# EAGLE board PCB-DISPARRAY4b (EAGLE 7.1.0)
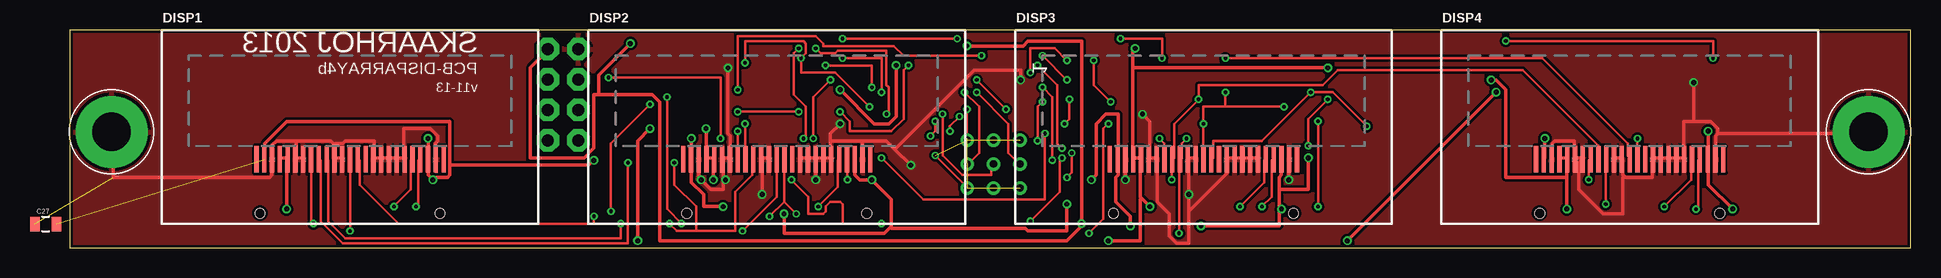
[diagram p0: board, top side]
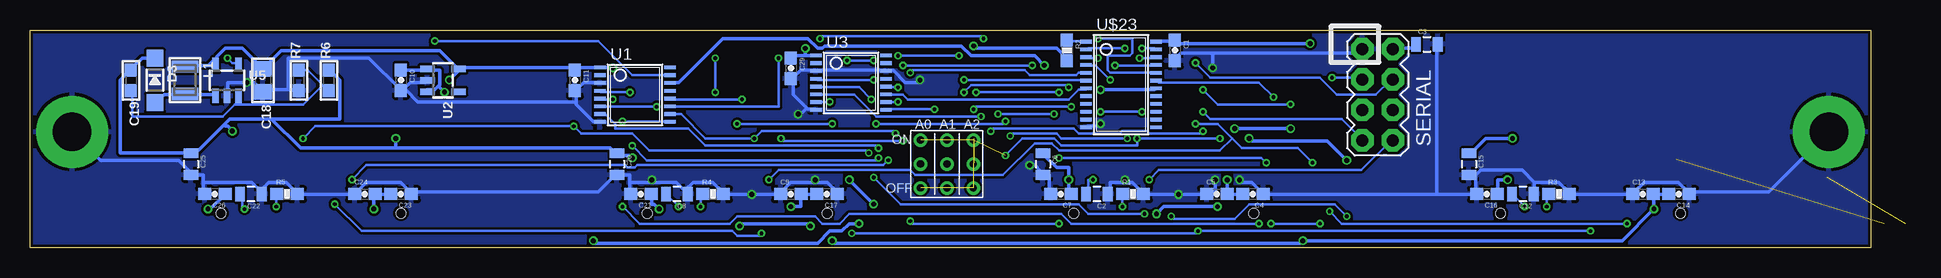
[diagram p1: board, bottom side, seen from below]

Size 153.42 x 18.2 mm. Coordinates in mm from the lower left corner, seen from the top.
Outline: 153.42,0 153.42,18.2 0,18.2 0,0 153.42,0
Copper layers (1*16): Top 0.035mm / dielectric 1.5mm / Bottom 0.035mm
Design rules "Fusion_eagle_rule_v1.1": minimum track width 6mil, minimum drill 12mil, track to track 6mil, track to pad 6mil, pad to pad 6mil, via to via 6mil, smd to smd 0mil, copper to edge 10mil, drill to drill 10mil, minimum pad ring 10mil, minimum via ring 6mil, stop-mask expansion 2mil, vias tented up to drill 100mil, thermal gap 10mil
Net classes: 0 default: width 0.203 mm, drill 0.305 mm, clearance 0.203 mm; 1 Power: width 0.305 mm, drill 0.406 mm, clearance 0.203 mm

## Footprints (pad centres in the part's own frame; a part is rotated, then mirrored left to right if it is on the bottom)
0603-CAP = smd 1.1 x 1: 1 -0.85,0; 2 0.85,0
0805 = smd 0.8 x 1.2: 1 -0.9,0; 2 0.9,0
0805' = smd 1.3 x 1.5: 1 -0.95,0; 2 0.95,0
0603 = smd 1.1 x 1: 1 -0.85,0; 2 0.85,0
SOD-123 = smd 1.4 x 1.4: A 1.85,0; C -1.85,0
ER-OLED011-1 = smd 0.35 x 2.2: 1 -7.8,-2.7; 2 -7.15,-2.7; 3 -6.5,-2.7; 4 -5.85,-2.7; 5 -5.2,-2.7; 6 -4.55,-2.7; 7 -3.9,-2.7; 8 -3.25,-2.7; 9 -2.6,-2.7; 10 -1.95,-2.7; 11 -1.3,-2.7; 12 -0.65,-2.7; 13 0,-2.7; 14 0.65,-2.7; 15 1.3,-2.7; 16 1.95,-2.7; 17 2.6,-2.7; 18 3.25,-2.7; 19 3.9,-2.7; 20 4.55,-2.7; 21 5.2,-2.7; 22 5.85,-2.7; 23 6.5,-2.7; 24 7.15,-2.7; 25 7.8,-2.7 | hole 0.8: -7.5,-7.2; 7.5,-7.2
INDUCTOR_1007 = smd 1.016 x 2.2: P$1 -1.127,0; P$2 1.127,0
0603-RES = smd 1.1 x 1: 1 -0.85,0; 2 0.85,0
2X4 = drill 1.016 pad 1.88 octagon: 1 -3.81,-1.27; 2 -3.81,1.27; 3 -1.27,-1.27; 4 -1.27,1.27; 5 1.27,-1.27; 6 1.27,1.27; 7 3.81,-1.27; 8 3.81,1.27
TSSOP16 = smd 0.305 x 0.991: 1 -3.575,-2.918; 2 -2.925,-2.918; 3 -2.275,-2.918; 4 -1.625,-2.918; 5 -0.975,-2.918; 6 -0.325,-2.918; 7 0.325,-2.918; 8 0.975,-2.918; 9 0.975,2.918; 10 0.325,2.918; 11 -0.325,2.918; 12 -0.975,2.918; 13 -1.625,2.918; 14 -2.275,2.918; 15 -2.925,2.918; 16 -3.575,2.918
SOT23-5 = smd 0.55 x 1.2: 1 -0.95,-1.3; 2 0,-1.3; 3 0.95,-1.3; 4 0.95,1.3; 5 -0.95,1.3
3.2MMPAD6MM = drill 3.2 pad 6: P$1 0,0
3BITADDR = drill 0.6: A0 -2.2,0; A1 0,0; A2 2.2,0; H1 -2.2,2; H2 0,2; H3 2.2,2; L1 -2.2,-2; L2 0,-2; L3 2.2,-2
TSSOP24 = smd 0.305 x 0.991: 1 -4.225,-2.918; 2 -3.575,-2.918; 3 -2.925,-2.918; 4 -2.275,-2.918; 5 -1.625,-2.918; 6 -0.975,-2.918; 7 -0.325,-2.918; 8 0.325,-2.918; 9 0.975,-2.918; 10 1.625,-2.918; 11 2.275,-2.918; 12 2.925,-2.918; 13 2.925,2.918; 14 2.275,2.918; 15 1.625,2.918; 16 0.975,2.918; 17 0.325,2.918; 18 -0.325,2.918; 19 -0.975,2.918; 20 -1.625,2.918; 21 -2.275,2.918; 22 -2.925,2.918; 23 -3.575,2.918; 24 -4.225,2.918

## Placement (x,y rotation side)
C1  0.1uF  [0603-CAP]  58,16.5 270 bottom
C2  4.7uF/25V  [0805]  64.5,4.5 180 bottom
C3  10uF  [0805]  37,17 0 bottom
C4  100nF  [0603-CAP]  51.5,4.5 180 bottom
C5  4.7uF  [0603-CAP]  54.5,4.5 0 bottom
C6  10uF  [0805]  69,7 270 bottom
C7  100nF  [0603-CAP]  67.5,4.5 180 bottom
C8  4.7uF/25V  [0805]  99.5,4.5 180 bottom
C9  100nF  [0603-CAP]  90,4.5 0 bottom
C10  2.2uF  [0603-CAP]  122.5,14 270 bottom
C11  0.1uF  [0603-CAP]  108,14 270 bottom
C12  4.7uF/25V  [0805]  29,4.5 180 bottom
C13  100nF  [0603-CAP]  19,4.5 0 bottom
C14  4.7uF  [0603-CAP]  16,4.5 180 bottom
C15  10uF  [0805]  33.5,7 270 bottom
C16  100nF  [0603-CAP]  32,4.5 180 bottom
C17  4.7uF  [0603-CAP]  87,4.5 180 bottom
C18  10uF  [0805']  134,14 270 bottom
C19  0.1uF  [0603]  145,14 270 bottom
C20  10uF  [0805]  104.5,7 270 bottom
C21  100nF  [0603-CAP]  102.5,4.5 180 bottom
C22  4.7uF/25V  [0805]  135,4.5 180 bottom
C23  100nF  [0603-CAP]  122.5,4.5 180 bottom
C24  4.7uF  [0603-CAP]  125.5,4.5 0 bottom
C25  10uF  [0805]  140,7 270 bottom
C26  100nF  [0603-CAP]  138,4.5 180 bottom
C27  10uF/25V  [0805]  -2,2 0 top
C29  0.1uF  [0603-CAP]  90,15 270 bottom
D3  BAT54T1G  [SOD-123]  143,14 270 bottom
DISP1  [ER-OLED011-1]  23.37,10.1 0 top
DISP2  [ER-OLED011-1]  58.93,10.1 0 top
DISP3  [ER-OLED011-1]  94.49,10.1 0 top
DISP4  [ER-OLED011-1]  130,10.1 0 top
L1  10uH  [INDUCTOR_1007]  140.5,14 270 bottom
R1  390K  [0603-RES]  61.5,4.5 0 bottom
R2  10K  [0603-RES]  67,16.5 270 bottom
R3  390K  [0603-RES]  26,4.5 0 bottom
R4  390K  [0603-RES]  96.5,4.5 0 bottom
R5  390K  [0603-RES]  132,4.5 0 bottom
R6  51K  [0603]  128.5,14 90 bottom
R7  10K  [0603]  131,14 90 bottom
SERIAL  M04X2  [2X4]  41.12,12.79 270 bottom
U1  74HC4050D  [TSSOP16]  103,11.5 270 bottom
U2  [SOT23-5]  119,14 270 bottom
U3  74HC4050D  [TSSOP16]  85,12.5 270 bottom
U5  FAN5331SX  [SOT23-5]  137,14 0 bottom
U$11  GNDPAD6MM  [3.2MMPAD6MM]  149.92,9.7 0 top
U$18  GNDPAD6MM  [3.2MMPAD6MM]  3.5,9.7 0 top
U$19  3BITADDR  [3BITADDR]  77,7 0 bottom
U$23  PCA9671  [TSSOP24]  62.5,13 270 bottom

## Library data of the parts
C1-C17 C20-C27 C29 R1-R5 SERIAL = SparkFun
C18 C19 D3 L1 R6 R7 U2 U5 = microbuilder
DISP1-DISP4 U1 U3 U$11 U$18 U$19 U$23 = SKAARHOJ

## Nets
3.3V [Power]: C4.2 C5.2 C9.2 C11.1 C13.2 C14.2 C17.2 C18.1 C23.2 C24.2 C29.1 DISP1.4 DISP1.5 DISP2.4 DISP2.5 DISP3.4 DISP3.5 DISP4.4 DISP4.5 L1.P$1 U1.1 U2.5 U3.1 U5.5
5V [Power]: C1.1 C3.1 C10.1 R2.2 SERIAL.2 U2.1 U2.3 U$23.24
7.5V [Power]: C6.1 C7.1 C15.1 C16.1 C19.1 C20.1 C21.1 C25.1 C26.1 C27.2 D3.C DISP1.2 DISP1.23 DISP2.2 DISP2.23 DISP3.2 DISP3.23 DISP4.2 DISP4.23 R6.2
A0: U$19.A0 U$23.21
A1: U$19.A1 U$23.2
A2: U$19.A2 U$23.3
CS_DISP1: DISP1.8 U3.4
CS_DISP2: DISP2.8 U3.6
CS_DISP3: DISP3.8 U3.10
CS_DISP4: DISP4.8 U3.12
DC_3V3: DISP1.10 DISP2.10 DISP3.10 DISP4.10 U1.10
DC_5V: U1.9 U$23.19
DPWR_3V3: U1.15 U5.4
DPWR_5V [Power]: U1.14 U$23.18
GND [Power]: C1.2 C2.1 C3.2 C4.1 C5.1 C6.2 C7.2 C8.1 C9.1 C10.2 C11.2 C12.1 C13.1 C14.1 C15.2 C16.2 C17.1 C18.2 C20.2 C21.2 C22.1 C23.1 C24.1 C25.2 C26.2 C27.1 C29.2 DISP1.3 DISP1.6 DISP1.7 DISP1.11 DISP1.12 DISP1.16 DISP1.17 DISP1.18 DISP1.19 DISP1.20 DISP1.24 DISP2.3 DISP2.6 DISP2.7 DISP2.11 DISP2.12 DISP2.16 DISP2.17 DISP2.18 DISP2.19 DISP2.20 DISP2.24 DISP3.3 DISP3.6 DISP3.7 DISP3.11 DISP3.12 DISP3.16 DISP3.17 DISP3.18 DISP3.19 DISP3.20 DISP3.24 DISP4.3 DISP4.6 DISP4.7 DISP4.11 DISP4.12 DISP4.16 DISP4.17 DISP4.18 DISP4.19 DISP4.20 DISP4.24 R1.2 R3.2 R4.2 R5.2 R7.1 SERIAL.1 U1.3 U1.8 U2.2 U3.3 U3.8 U3.14 U5.2 U$11.P$1 U$18.P$1 U$23.12
I2C_SCL: SERIAL.4 U$19.L1 U$19.L2 U$19.L3 U$23.22
I2C_SDA: SERIAL.3 U$19.H1 U$19.H2 U$19.H3 U$23.23
N$1: R2.1 U$23.1
N$2: DISP2.21 R1.1
N$3: C2.2 DISP2.22
N$4: DISP3.21 R4.1
N$5: DISP1.21 R3.1
N$6: C8.2 DISP3.22
N$7: DISP4.21 R5.1
N$8: C22.2 DISP4.22
N$10: C12.2 DISP1.22
N$14 [Power]: D3.A L1.P$2 U5.1
N$15: C19.2 R6.1 R7.2 U5.3
N$29: U3.5 U$23.4
N$30: U3.7 U$23.5
N$31: U3.9 U$23.6
N$32: U3.11 U$23.7
RES_3V3: DISP1.9 DISP2.9 DISP3.9 DISP4.9 U1.12
RES_5V: U1.11 U$23.20
SCLK_3V3: DISP1.13 DISP2.13 DISP3.13 DISP4.13 U1.6
SDIN_3V3: DISP1.14 DISP2.14 DISP3.14 DISP4.14 U1.4
SPI_MOSI: SERIAL.8 U1.5
SPI_SCLK: SERIAL.7 U1.7

## Tracks (layer width: path | path; a pad name or v marks a point on that pad's centre or on a via)
3.3V  (via drill 0.41)
  Top 0.305: v53.65,5.69 53.65,7.32 DISP2.5 53.65,7.52 53.24,7.52 DISP2.4 53.03,7.52 v53.03,9.96 | v18.09,3.25 18.09,7.32 DISP1.5 18.09,7.52 17.68,7.52 DISP1.4 | v48.36,9.96 47.35,8.94 v47.35,0.61 | 89.31,4.17 89.2,4.27 89.2,7.32 DISP3.5 89.2,7.52 88.8,7.52 DISP3.4 88.59,7.52 88.59,15.04 | 89.31,4.17 v90.02,3.45 | v88.8,16.66 88.59,16.46 88.59,15.04 | 124.77,5.89 124.77,7.32 DISP4.5 124.77,7.52 124.16,7.52 DISP4.4 | 124.77,5.89 v124.77,3.25 | 124.77,5.89 119.69,5.89 119.69,13.21 118.87,14.02 v118.47,14.02 | v104.85,15.04 88.59,15.04 | v86.56,0.61 89.2,0.61 89.2,4.06 89.31,4.17
  Bottom 0.305: C4.2 52.43,4.47 53.65,4.47 C5.2 53.65,4.67 v53.65,5.69 | 18.09,4.47 16.87,4.47 C14.2 | 18.09,4.47 v18.09,3.25 20.73,0.61 v47.35,0.61 47.55,0.41 86.36,0.41 v86.56,0.61 | 18.09,4.47 C13.2 | v48.36,9.96 v53.03,9.96 | C17.2 87.99,4.47 89,4.47 C9.2 89.2,4.47 89.2,3.45 v90.02,3.45 | 88.8,16.05 89.81,16.05 C29.1 | 88.8,16.05 87.99,16.05 U3.1 | v88.8,16.66 88.8,16.05 | 138.58,15.24 140.41,15.24 L1.P$1 | 138.58,15.24 137.97,15.24 U5.5 | 138.58,15.24 137.16,16.66 135.74,16.66 134.11,15.04 C18.1 133.91,15.04 132.49,16.46 119.28,16.46 117.86,15.04 U2.5 | C23.2 123.55,4.47 124.56,4.47 C24.2 124.77,4.47 v124.77,3.25 | U2.5 117.65,15.04 108.1,15.04 C11.1 107.9,15.04 106.07,15.04 U1.1 105.87,15.04 v104.85,15.04 | v118.47,14.02 117.65,14.83 U2.5
5V  (via drill 0.41)
  Top 0.305: v74.78,16.87 79.45,16.87 79.86,17.27 84.33,17.27 v84.33,2.03 84.33,1.83 83.11,0.61 49.17,0.61 49.17,12.19 48.56,12.8 44.09,12.8 | 44.09,12.8 43.69,12.8 43.69,8.33 42.88,7.52 38.41,7.52 38.41,15.04 39.83,16.46 SERIAL.2 | v46.74,17.07 44.09,14.43 44.09,12.8 | v106.48,0.61 v118.87,13.01
  Bottom 0.305: C10.1 122.33,14.83 120.5,14.83 U2.1 120.29,14.83 119.28,14.83 119.28,13.61 119.38,13.51 | 119.38,13.51 119.69,13.21 120.29,13.21 U2.3 | U$23.24 59.54,17.27 58.12,17.27 C1.1 57.91,17.27 57.71,17.07 v46.74,17.07 | v74.78,16.87 74.57,16.66 67.87,16.66 67.06,15.85 R2.2 | C3.1 38,16.87 38.2,16.66 39.83,16.66 SERIAL.2 | v118.87,13.01 119.38,13.51 | v106.48,0.61 106.27,0.41 87.78,0.41 86.77,1.42 85.75,1.42 85.14,2.03 v84.33,2.03
7.5V  (via drill 0.41)  (1 unrouted)
  Top 0.305: 65.43,7.52 DISP2.23 65.43,7.32 65.43,6.1 65.84,5.69 v66.85,5.69 68.48,4.06 68.48,1.83 68.38,1.73 | v29.87,9.14 29.87,7.52 DISP1.23 29.87,7.32 29.87,6.1 v30.28,5.69 30.28,5.89 31.5,5.89 31.7,6.1 31.7,6.91 | 31.7,6.91 31.7,10.57 18.09,10.57 16.26,8.74 16.26,7.52 DISP1.2 | v51.82,9.14 51.82,7.52 DISP2.2 51.82,7.32 51.82,5.49 52.83,4.47 52.83,3.45 v54.46,3.45 | v43.69,7.32 43.28,6.91 31.7,6.91 | 68.38,1.73 67.87,1.22 59.54,1.22 v59.54,2.85 | 100.79,4.88 100.79,5.89 100.99,6.1 100.99,7.32 DISP3.23 100.99,7.52 | 100.79,4.88 100.79,3.45 v100.99,3.25 100.79,3.25 100.79,1.83 v94.28,1.83 | v88.39,1.83 88.39,2.64 87.17,3.86 87.17,5.89 87.38,6.1 87.38,7.32 DISP3.2 87.38,7.52 87.38,11.18 86.36,11.18 85.55,10.36 85.55,6.1 v85.14,5.69 | v138.58,3.25 136.55,5.28 136.55,7.32 DISP4.23 136.55,7.52 v136.55,9.75 | v122.94,9.14 122.94,7.52 DISP4.2 | 100.79,4.88 103.23,4.88 v103.23,7.52 | v83.11,3.66 83.11,1.42 79.86,1.42 79.65,1.63 68.48,1.63 68.38,1.73
  Bottom 0.305: C7.1 66.85,4.67 v66.85,5.69 66.85,6.71 67.87,6.71 68.89,7.72 C6.1 | v30.28,5.69 31.09,5.69 31.09,4.67 C16.1 | v29.87,9.14 32.11,9.14 33.33,7.92 C15.1 | v51.82,9.14 51.61,8.94 45.31,8.94 v43.69,7.32 | v59.54,2.85 58.93,3.45 v54.46,3.45 | v100.99,3.25 101.4,3.66 101.6,3.66 101.6,4.47 C21.1 | v88.39,1.83 88.59,2.03 94.08,2.03 v94.28,1.83 | v138.58,3.25 138.38,3.25 137.16,4.47 C26.1 | D3.C 143.05,15.85 144.07,15.85 144.88,15.04 C19.1 145.09,14.83 145.9,14.02 145.9,7.92 140,7.92 C25.1 139.8,7.92 139.6,7.92 137.26,10.26 | 133.3,10.77 136.75,10.77 137.26,10.26 | 133.3,10.77 127.61,10.77 127.61,14.02 128.42,14.83 R6.2 | 122.94,8.33 130.86,8.33 133.3,10.77 | 122.94,8.33 105.05,8.33 104.65,7.92 C20.1 104.44,7.72 103.43,7.72 v103.23,7.52 | 122.94,8.33 v122.94,9.14 | v136.55,9.75 136.96,10.16 137.16,10.16 137.26,10.26 | v85.14,5.69 v83.11,3.66
A0  (via drill 0.3)
  Top 0.203: v62.99,15.24 66.85,15.24 v66.85,13.41 | v75.59,13.01 78.23,10.36 78.23,7.92 79.05,7.11 U$19.A0
  Bottom 0.203: v62.99,15.24 59.74,15.24 U$23.21 | v66.85,13.41 67.06,13.61 74.98,13.61 v75.59,13.01
A1  (via drill 0.3)
  Top 0.203: v62.18,16.66 62.59,16.26 63.8,16.26 64.01,16.46 68.07,16.46 68.07,13.61 68.28,13.41 68.28,11.38 v68.07,11.18 | v72.75,11.18 72.75,7.72 74.37,6.1 76.81,6.1 76.81,6.91 U$19.A1
  Bottom 0.203: v62.18,16.66 65.23,16.66 U$23.2 | v72.75,11.18 v68.07,11.18
A2  (via drill 0.3)
  Top 0.203: v64.41,15.85 67.67,15.85 v67.67,13.01 | v74.57,13.01 75.79,11.79 75.79,7.92 74.98,7.11 U$19.A2
  Bottom 0.203: v64.41,15.85 65.23,15.85 U$23.3 | v74.57,13.01 v67.67,13.01
CS_DISP1  (via drill 0.3)
  Top 0.203: v81.08,16.05 v83.11,14.02 | v76,16.05 69.49,16.05 68.68,16.87 62.79,16.87 62.79,17.07 62.18,17.68 55.68,17.68 v55.68,13.21 | v48.36,11.99 45.11,8.74 v45.11,3.05 | v20.32,2.03 20.12,2.23 20.12,7.32 DISP1.8
  Bottom 0.203: v83.11,14.02 87.78,14.02 U3.4 | v76,16.05 v81.08,16.05 | v55.68,13.21 54.46,11.99 v48.36,11.99 | v45.11,3.05 44.09,2.03 v20.32,2.03
CS_DISP2  (via drill 0.3)
  Top 0.203: v74.17,10.97 73.36,10.16 v73.36,9.75 | v55.68,9.75 55.68,7.52 DISP2.8
  Bottom 0.203: v74.17,10.97 82.91,10.97 84.73,12.8 87.78,12.8 U3.6 | v73.36,9.75 73.15,9.96 66.45,9.96 66.04,9.55 62.59,9.55 62.38,9.75 60.35,9.75 60.15,9.55 55.88,9.55 v55.68,9.75
CS_DISP3  (via drill 0.3)
  Top 0.203: v81.08,12.19 80.67,11.79 v80.67,8.94 | v90.83,9.14 91.24,8.74 91.24,7.52 DISP3.8
  Bottom 0.203: v81.08,12.19 81.89,12.19 U3.10 | v80.67,8.94 90.63,8.94 v90.83,9.14
CS_DISP4  (via drill 0.3)
  Top 0.203: v81.08,13.41 81.89,12.6 v81.89,7.32 | v126.59,5.69 126.59,7.32 DISP4.8
  Bottom 0.203: v81.08,13.41 81.89,13.41 U3.12 | v81.89,7.32 82.3,6.91 102.82,6.91 103.02,6.71 103.63,6.71 103.83,6.91 125.37,6.91 v126.59,5.69
DC_3V3  (via drill 0.3)
  Top 0.203: v45.92,2.03 45.92,0.81 22.96,0.81 21.54,2.23 21.54,7.32 DISP1.10 | v49.99,2.03 50.6,1.42 52.22,1.42 | 52.22,1.42 55.47,1.42 55.47,4.67 56.9,6.1 56.9,7.32 DISP2.10 | v93.07,9.14 92.66,8.74 92.66,7.52 DISP3.10 92.46,7.32 v92.46,1.22 | v128.02,3.66 128.02,7.32 DISP4.10 | 52.22,1.42 52.22,3.45 50.39,5.28 v50.39,7.11 | v67.67,7.52 71.12,4.06 81.28,4.06 v81.28,9.55
  Bottom 0.203: v49.99,2.03 v45.92,2.03 | U1.10 99.97,11.18 99.16,11.18 97.13,9.14 v93.07,9.14 92.46,9.75 81.48,9.75 v81.28,9.55 | v128.02,3.66 125.78,1.42 94.89,1.42 94.49,1.02 92.66,1.02 v92.46,1.22 | v50.39,7.11 50.8,7.52 v67.67,7.52
DC_5V  (via drill 0.3)
  Top 0.203: v104.04,3.45 v104.04,10.57 | v51,2.03 49.78,3.25 v49.78,12.6
  Bottom 0.203: v104.04,10.57 100.18,10.57 U1.9 | v104.04,3.45 102.62,2.03 95.1,2.03 94.49,2.64 87.99,2.64 87.38,2.03 85.95,2.03 85.14,2.85 67.46,2.85 66.65,2.03 v51,2.03 | v49.78,12.6 51,13.82 59.33,13.82 59.54,14.02 U$23.19
DPWR_3V3  (via drill 0.3)
  Top 0.203: v119.69,17.27 136.96,17.27 v136.96,15.85
  Bottom 0.203: v119.69,17.27 106.07,17.27 103.23,14.43 100.18,14.43 U1.15 | v136.96,15.85 136.55,15.44 136.14,15.44 U5.4
DPWR_5V  (via drill 0.41)
  Top 0.305: v64.21,13.21 67.06,10.36 68.28,10.36 68.89,10.97 v68.89,15.24
  Bottom 0.305: v64.21,13.21 59.74,13.21 U$23.18 | v68.89,15.24 69.7,16.05 74.98,16.05 75.79,16.87 87.17,16.87 87.38,16.66 87.78,16.66 88.59,17.48 95.71,17.48 99.36,13.82 99.97,13.82 U1.14
GND  (via drill 0.41)  (1 unrouted)
  Top 0.305: 22.15,7.52 22.55,7.52 DISP1.12 | 18.9,8.94 17.27,8.94 16.87,8.53 16.87,7.52 DISP1.3 16.87,7.32 16.87,6.1 16.66,5.89 3.66,5.89 3.66,9.55 U$18.P$1 | 18.9,7.52 18.9,8.94 | 18.9,7.52 19.3,7.52 DISP1.7 | 18.9,7.52 DISP1.6 | 22.15,7.52 22.15,8.53 22.05,8.64 | 22.05,8.64 21.74,8.94 18.9,8.94 | 22.15,7.52 DISP1.11 | 25.4,7.52 25.81,7.52 DISP1.17 26.01,7.52 26.62,7.52 | 27.84,7.52 27.43,7.52 DISP1.19 27.23,7.52 26.62,7.52 | 27.84,7.52 27.84,9.96 30.07,9.96 30.68,9.35 30.68,8.94 30.48,8.74 30.48,7.52 DISP1.24 | 27.84,7.52 DISP1.20 | 26.62,7.52 DISP1.18 | 25.4,7.52 25.4,8.94 22.96,8.94 22.76,8.74 22.15,8.74 22.05,8.64 | 25.4,7.52 DISP1.16 | 68.78,8.23 68.07,8.94 66.04,8.94 | 68.78,8.23 v70.1,6.91 | 66.04,8.94 66.04,7.52 DISP2.24 | DISP2.16 60.96,7.52 61.37,7.52 DISP2.17 61.57,7.52 62.18,7.52 | v64.21,10.36 63.4,9.55 63.4,8.94 | 63.4,7.52 63.4,8.94 | 63.4,7.52 62.99,7.52 DISP2.19 62.79,7.52 62.18,7.52 | 63.4,7.52 DISP2.20 | 62.18,7.52 DISP2.18 62.18,7.32 v62.18,5.69 | 63.4,8.94 66.04,8.94 | 54.46,5.69 54.46,7.32 DISP2.6 54.46,7.52 54.86,7.52 DISP2.7 55.07,7.52 55.07,9.35 54.86,9.55 v54.86,15.04 | 54.46,5.69 54.46,4.88 53.44,4.88 v52.63,5.69 52.43,5.89 52.43,7.32 DISP2.3 | DISP2.12 58.12,7.52 57.71,7.52 DISP2.11 57.71,7.32 v57.71,4.47 | v54.66,5.69 54.46,5.69 | DISP3.20 98.96,7.52 98.55,7.52 DISP3.19 98.35,7.52 97.74,7.52 | 97.74,7.52 97.13,7.52 DISP3.17 96.93,7.52 96.52,7.52 DISP3.16 96.52,7.32 96.52,6.3 93.27,3.05 | 97.74,7.52 DISP3.18 | 90.02,7.52 90.42,7.52 DISP3.7 90.63,7.32 90.63,3.86 91.64,2.85 91.64,1.02 92.25,0.41 93.27,0.41 93.27,3.05 | DISP3.12 93.67,7.52 93.27,7.52 DISP3.11 93.27,7.32 v93.27,4.47 93.27,3.05
  Top 0.305: v89.41,11.18 90.02,10.57 90.02,7.52 | 90.02,7.52 DISP3.6 | v101.6,5.69 101.6,7.32 DISP3.24 | v87.99,5.69 87.99,7.32 DISP3.3 | DISP4.3 123.55,7.52 123.55,8.74 123.75,8.94 125.37,8.94 125.37,7.52 DISP4.6 125.58,7.52 125.98,7.52 DISP4.7 125.98,7.32 125.78,7.11 125.78,4.88 127.81,2.85 129.44,2.85 129.44,5.89 129.54,5.99 | DISP4.11 128.83,7.52 129.24,7.52 DISP4.12 129.44,7.32 129.44,6.1 129.54,5.99 | 133.91,7.52 133.3,7.52 DISP4.18 133.1,7.52 132.69,7.52 DISP4.17 132.49,7.52 132.08,7.52 DISP4.16 131.88,7.32 131.88,5.89 129.64,5.89 129.54,5.99 | 133.91,7.52 134.52,7.52 | 133.91,7.52 DISP4.19 | 137.36,9.55 137.16,9.35 137.16,7.52 DISP4.24 | 137.36,9.55 137.36,9.96 136.75,10.57 135.33,10.57 | 135.33,10.57 134.52,10.57 134.52,7.52 | 134.52,7.52 DISP4.20 | 137.36,9.55 149.76,9.55 U$11.P$1 | 135.33,10.57 v135.33,13.82 | 68.78,8.23 75.39,14.83 79.25,14.83 v79.25,14.02
  Bottom 0.305: 54.86,16.26 42.67,16.26 42.47,16.46 SERIAL.1 | 54.86,16.26 57.51,16.26 57.91,15.85 C1.2 | C7.2 68.48,4.67 68.48,6.1 68.89,6.1 C6.2 69.09,6.3 69.7,6.91 v70.1,6.91 | v64.21,10.36 64.41,10.16 65.23,10.16 U$23.12 | 62.18,5.49 61.57,5.49 60.76,4.67 R1.2 60.55,4.47 v57.71,4.47 55.47,4.47 C5.1 55.27,4.67 54.66,4.67 v54.66,5.69 | 62.18,5.49 63.4,5.49 63.4,4.67 C2.1 | 62.18,5.49 v62.18,5.69 | v54.86,15.04 54.86,16.26 | 28.04,5.49 28.04,4.67 C12.1 | 28.04,5.49 26.01,5.49 25.2,4.67 R3.2 24.99,4.47 19.91,4.47 C13.1 19.71,4.67 18.9,5.49 16.05,5.49 15.24,4.67 C14.1 15.04,4.67 8.53,4.67 3.66,9.55 U$18.P$1 | 32.92,6.1 32.92,4.67 C16.2 32.92,4.47 36.17,4.47 | 32.92,6.1 33.33,6.1 C15.2 32.92,6.1 | 36.17,4.47 50.6,4.47 C4.1 50.8,4.67 51.61,5.49 52.43,5.49 v52.63,5.69 | 36.17,4.47 36.17,16.87 C3.2 | 28.04,5.49 29.06,6.5 32.51,6.5 32.92,6.1 | 131.88,13.21 133.91,13.21 C18.2 134.11,13.21 134.72,13.82 v135.33,13.82 136.96,13.82 136.96,12.8 U5.2 | 131.88,13.21 131.06,13.21 R7.1 | C10.2 122.33,13.21 121.72,13.82 120.5,13.82 U2.2 | 107.9,12.19 107.9,13.01 C11.2 107.9,13.21 107.29,13.82 106.07,13.82 U1.3 | 107.9,12.19 107.9,11.99 106.48,10.57 106.07,10.57 U1.8 | 107.9,12.19 121.11,12.19 122.12,13.21 C10.2 | 131.88,13.21 131.88,15.85 125.17,15.85 122.53,13.21 C10.2 | 88.7,11.68 89.81,12.8 89.81,14.02 C29.2 89.81,14.22 89.2,14.83 87.99,14.83 U3.3 87.78,14.83 82.09,14.83 U3.14 81.89,14.83 81.48,14.83 80.47,13.82 79.45,13.82 v79.25,14.02 | 88.7,11.68 88.59,11.58 87.99,11.58 U3.8 | 88.7,11.68 89.2,11.18 v89.41,11.18 | 103.43,5.49 103.43,6.1 104.44,6.1 C20.2 104.65,6.1 106.07,4.67 121.51,4.67 C23.1 121.72,4.67 122.53,5.49 125.37,5.49 126.19,4.67 C24.1 126.39,4.47 131.06,4.47 R5.2 131.27,4.67 132.08,5.49 133.5,5.49 134.11,4.88 C22.1 134.11,4.67 134.93,5.49 138.99,5.49
  Bottom 0.305: 103.43,5.49 103.43,4.67 C21.2 | 103.43,5.49 101.6,5.49 | 101.6,5.49 99.57,5.49 98.75,4.67 C8.1 98.75,4.88 98.15,5.49 96.52,5.49 95.71,4.67 R4.2 95.5,4.47 v93.27,4.47 91.03,4.47 C9.1 90.83,4.67 90.02,5.49 87.99,5.49 | 101.6,5.49 v101.6,5.69 | 87.99,5.49 86.97,5.49 86.16,4.67 C17.1 | 87.99,5.49 v87.99,5.69 | 138.99,5.49 138.99,6.1 139.8,6.1 C25.2 140,6.3 141.02,7.32 147.52,7.32 149.76,9.55 U$11.P$1 | 138.99,5.49 138.99,4.67 C26.2
  pour Top: 0,0 153,0 153,18 0,18
  pour Bottom: 0,0 153,0 153,18 0,18
I2C_SCL  (via drill 0.3)  (3 unrouted)
  Top 0.203: v56.29,15.44 56.29,17.27 61.16,17.27 61.37,17.07 61.37,16.26 v60.96,15.85 60.96,14.63 63.8,14.63 v66.65,11.79 | v74.78,11.58 74.78,9.14
  Bottom 0.203: v60.96,15.85 59.74,15.85 U$23.22 | v56.29,15.44 55.07,14.22 45.92,14.22 44.5,12.8 41.25,12.8 40.03,14.02 SERIAL.4 | v74.78,11.58 74.57,11.79 v66.65,11.79
I2C_SDA  (via drill 0.3)  (3 unrouted)
  Top 0.203: v60.76,16.66 60.35,16.26 60.35,12.8 61.37,11.79 61.37,9.35 v61.16,9.14 | 74.78,5.08 v72.14,7.72 | v44.91,14.22 54.25,14.22 v54.25,9.14
  Bottom 0.203: v60.76,16.66 59.74,16.66 U$23.23 | v72.14,7.72 70.71,9.14 68.07,9.14 67.46,8.53 61.16,8.53 v61.16,9.14 v54.25,9.14 | v44.91,14.22 42.47,14.22 SERIAL.3
N$1
  Bottom 0.203: U$23.1 65.43,17.27 66.85,17.27 R2.1
N$2  (via drill 0.3)
  Top 0.203: v62.38,3.45 64.01,5.08 64.01,7.32 DISP2.21
  Bottom 0.203: v62.38,3.45 62.38,4.47 R1.1
N$3  (via drill 0.3)
  Top 0.203: v64.82,5.69 64.82,7.32 DISP2.22
  Bottom 0.203: v64.82,5.69 65.23,5.69 65.23,4.67 C2.2
N$4  (via drill 0.3)
  Top 0.203: v97.54,3.45 99.57,5.49 99.57,7.32 DISP3.21
  Bottom 0.203: v97.54,3.45 97.54,4.47 R4.1
N$5  (via drill 0.3)
  Top 0.203: v27.03,3.45 28.45,4.88 28.45,7.32 DISP1.21
  Bottom 0.203: v27.03,3.45 27.03,4.47 R3.1
N$6  (via drill 0.3)
  Top 0.203: v99.36,3.45 100.18,4.27 100.18,7.32 DISP3.22
  Bottom 0.203: v99.36,3.45 100.38,4.47 C8.2
N$7  (via drill 0.3)
  Top 0.203: v132.89,3.45 135.13,5.69 135.13,7.32 DISP4.21
  Bottom 0.203: v132.89,3.45 132.89,4.47 R5.1
N$8  (via drill 0.3)
  Top 0.203: v135.53,3.25 135.74,3.45 135.74,7.32 DISP4.22
  Bottom 0.203: v135.53,3.25 135.74,3.25 135.74,4.47 C22.2
N$10  (via drill 0.3)
  Top 0.203: v28.85,3.45 29.06,3.66 29.06,7.32 DISP1.22
  Bottom 0.203: v28.85,3.45 C12.2
N$14
  Bottom 0.305: U5.1 137.97,12.8 140.41,12.8 L1.P$2 140.61,12.8 142.24,12.8 142.85,12.19 D3.A
N$15
  Bottom 0.203: 129.03,13.61 130.25,14.83 130.86,14.83 R7.2 | 129.03,13.61 128.63,13.21 R6.1 | 136.35,11.99 136.14,12.19 136.14,12.6 U5.3 | 136.35,11.99 137.36,10.97 144.88,10.97 144.88,13.01 C19.2 | 129.03,13.61 130.66,11.99 136.35,11.99
N$29  (via drill 0.3)
  Top 0.203: v63.4,14.02 61.98,12.6 v61.98,9.14 | v71.73,9.35 72.14,9.75 v72.14,10.57 | v82.91,10.36 83.31,10.77 v83.31,12.39
  Bottom 0.203: v63.4,14.02 64.62,15.24 65.23,15.24 U$23.4 | v61.98,9.14 67.46,9.14 67.87,9.55 71.53,9.55 v71.73,9.35 | v72.14,10.57 72.34,10.36 v82.91,10.36 | v83.31,12.39 84.33,13.41 87.78,13.41 U3.5
N$30  (via drill 0.3)
  Top 0.203: v86.77,12.19 85.34,13.61 v85.34,15.65 | v83.11,15.65 82.09,16.66 80.06,16.66 v80.06,14.63
  Bottom 0.203: v86.77,12.19 87.78,12.19 U3.7 | v83.11,15.65 v85.34,15.65 | v80.06,14.63 79.86,14.83 70.51,14.83 70.1,14.43 66.24,14.43 66.04,14.63 U$23.5
N$31  (via drill 0.3)
  Top 0.203: v75.59,14.02 v78.03,11.58
  Bottom 0.203: v78.03,11.58 81.89,11.58 U3.9 | v75.59,14.02 65.43,14.02 U$23.6
N$32
  Bottom 0.203: U$23.7 65.43,13.21 66.04,13.21 66.85,12.39 80.26,12.39 80.67,12.8 81.89,12.8 U3.11
RES_3V3  (via drill 0.3)
  Top 0.203: DISP4.9 127.41,7.52 127.41,8.53 121.11,14.83 105.66,14.83 104.44,13.61 94.08,13.61 v94.08,12.39 92.05,10.36 92.05,7.52 DISP3.9 91.85,7.32 v91.85,5.69 | v46.53,7.11 46.53,0.41 22.76,0.41 20.93,2.23 20.93,7.32 DISP1.9 | v56.29,10.36 56.29,7.52 DISP2.9
  Bottom 0.203: v94.08,12.39 99.97,12.39 U1.12 | v46.53,7.11 47.75,8.33 52.43,8.33 53.24,9.14 | 53.24,9.14 54.46,10.36 v56.29,10.36 | v91.85,5.69 91.03,6.5 80.06,6.5 79.65,6.1 72.34,6.1 69.7,8.74 68.28,8.74 67.67,8.13 54.25,8.13 53.24,9.14
RES_5V  (via drill 0.3)
  Top 0.203: v73.97,17.48 v64.41,17.48 | v87.58,17.48 91.03,17.48 v91.03,15.85
  Bottom 0.203: v64.41,17.48 61.57,17.48 61.57,16.26 61.77,16.05 63.6,16.05 63.6,14.83 63.4,14.63 59.74,14.63 U$23.20 | v73.97,17.48 74.17,17.68 87.38,17.68 v87.58,17.48 | v91.03,15.85 91.03,11.79 99.97,11.79 U1.11
SCLK_3V3  (via drill 0.3)
  Top 0.203: v23.37,1.42 DISP1.13 | v56.08,1.42 58.93,4.27 DISP2.13 | 96.32,11.79 94.49,11.79 v94.49,10.36 DISP3.13 | 96.32,11.79 v101.19,11.79 | v96.32,15.85 122.73,15.85 129.84,8.74 129.84,7.72 130.05,7.52 DISP4.13 | 96.32,11.79 v96.32,13.01 | v84.94,1.22 86.16,2.44 86.16,9.96 v86.56,10.36
  Bottom 0.203: v23.37,1.42 v56.08,1.42 56.29,1.22 v84.94,1.22 | v101.19,11.79 105.87,11.79 U1.6 | v96.32,13.01 v96.32,15.85 | v94.49,10.36 v86.56,10.36
SDIN_3V3  (via drill 0.3)
  Top 0.203: v43.69,2.64 43.69,2.03 27.43,2.03 24.18,5.28 24.18,7.32 DISP1.14 | 59.54,3.86 v58.32,2.64 | 59.54,3.86 59.54,7.32 DISP2.14 | DISP3.14 95.3,7.52 95.3,8.94 99.36,8.94 v103.43,13.01 105.26,13.01 v108.1,10.16 | v130.66,9.14 130.66,7.52 DISP4.14 | v60.55,2.85 59.54,3.86 | v83.11,5.89 83.52,6.3 v83.52,7.92
  Bottom 0.203: v43.69,2.64 44.7,3.66 51.82,3.66 53.03,2.44 58.12,2.44 v58.32,2.64 | v103.43,13.01 105.87,13.01 U1.4 | v130.66,9.14 129.64,10.16 v108.1,10.16 107.49,9.55 103.23,9.55 101.8,8.13 83.72,8.13 v83.52,7.92 | v60.55,2.85 65.23,2.85 66.04,3.66 80.87,3.66 v83.11,5.89
SPI_MOSI  (via drill 0.3)
  Top 0.203: v104.85,12.39 103.23,10.77 v103.23,8.53 | v82.7,7.52 82.5,7.32 82.5,4.67 v80.06,2.23 | v67.67,2.03 64.41,2.03 64.41,3.66 64.21,3.86 63.4,3.86 62.99,3.45 62.99,3.05 62.79,2.85 61.57,2.85 61.57,4.27 v60.15,5.69
  Bottom 0.203: v104.85,12.39 105.87,12.39 U1.5 | v103.23,8.53 102.01,7.32 82.91,7.32 v82.7,7.52 | v80.06,2.23 79.86,2.03 v67.67,2.03 | v60.15,5.69 59.33,6.5 42.47,6.5 40.03,8.94 SERIAL.8
SPI_SCLK  (via drill 0.3)
  Top 0.203: v82.7,8.33 82.3,8.74 82.3,13.61 v80.67,15.24 | v69.9,15.24 69.49,14.83 69.49,10.77 68.48,9.75 65.02,9.75 65.02,10.57 v64.21,11.38 | v55.68,11.38 v60.76,11.38
  Bottom 0.203: v82.7,8.33 82.91,8.53 97.13,8.53 98.55,9.96 104.65,9.96 104.65,10.36 105.46,11.18 105.87,11.18 U1.7 | v69.9,15.24 v80.67,15.24 | v60.76,11.38 v64.21,11.38 | v55.68,11.38 55.07,10.77 44.09,10.77 42.47,9.14 SERIAL.7

## Text on the board
_tsilk: SKAARHOJ 2013 | 1 | PCB-DISPARRAY4b | v11-13